# Altium PCB PCB1.pcbdoc (part 2 of 4)
Units mil, origin at the board's own origin, x right, y up, seen from the top; angles counter-clockwise.
Board outline 3346.69 x 4227.01 mil, 4 copper layers (Top Layer, Inner1, Inner2, Bottom Layer); 103 components, 144 nets, 660 pads, 262 vias.
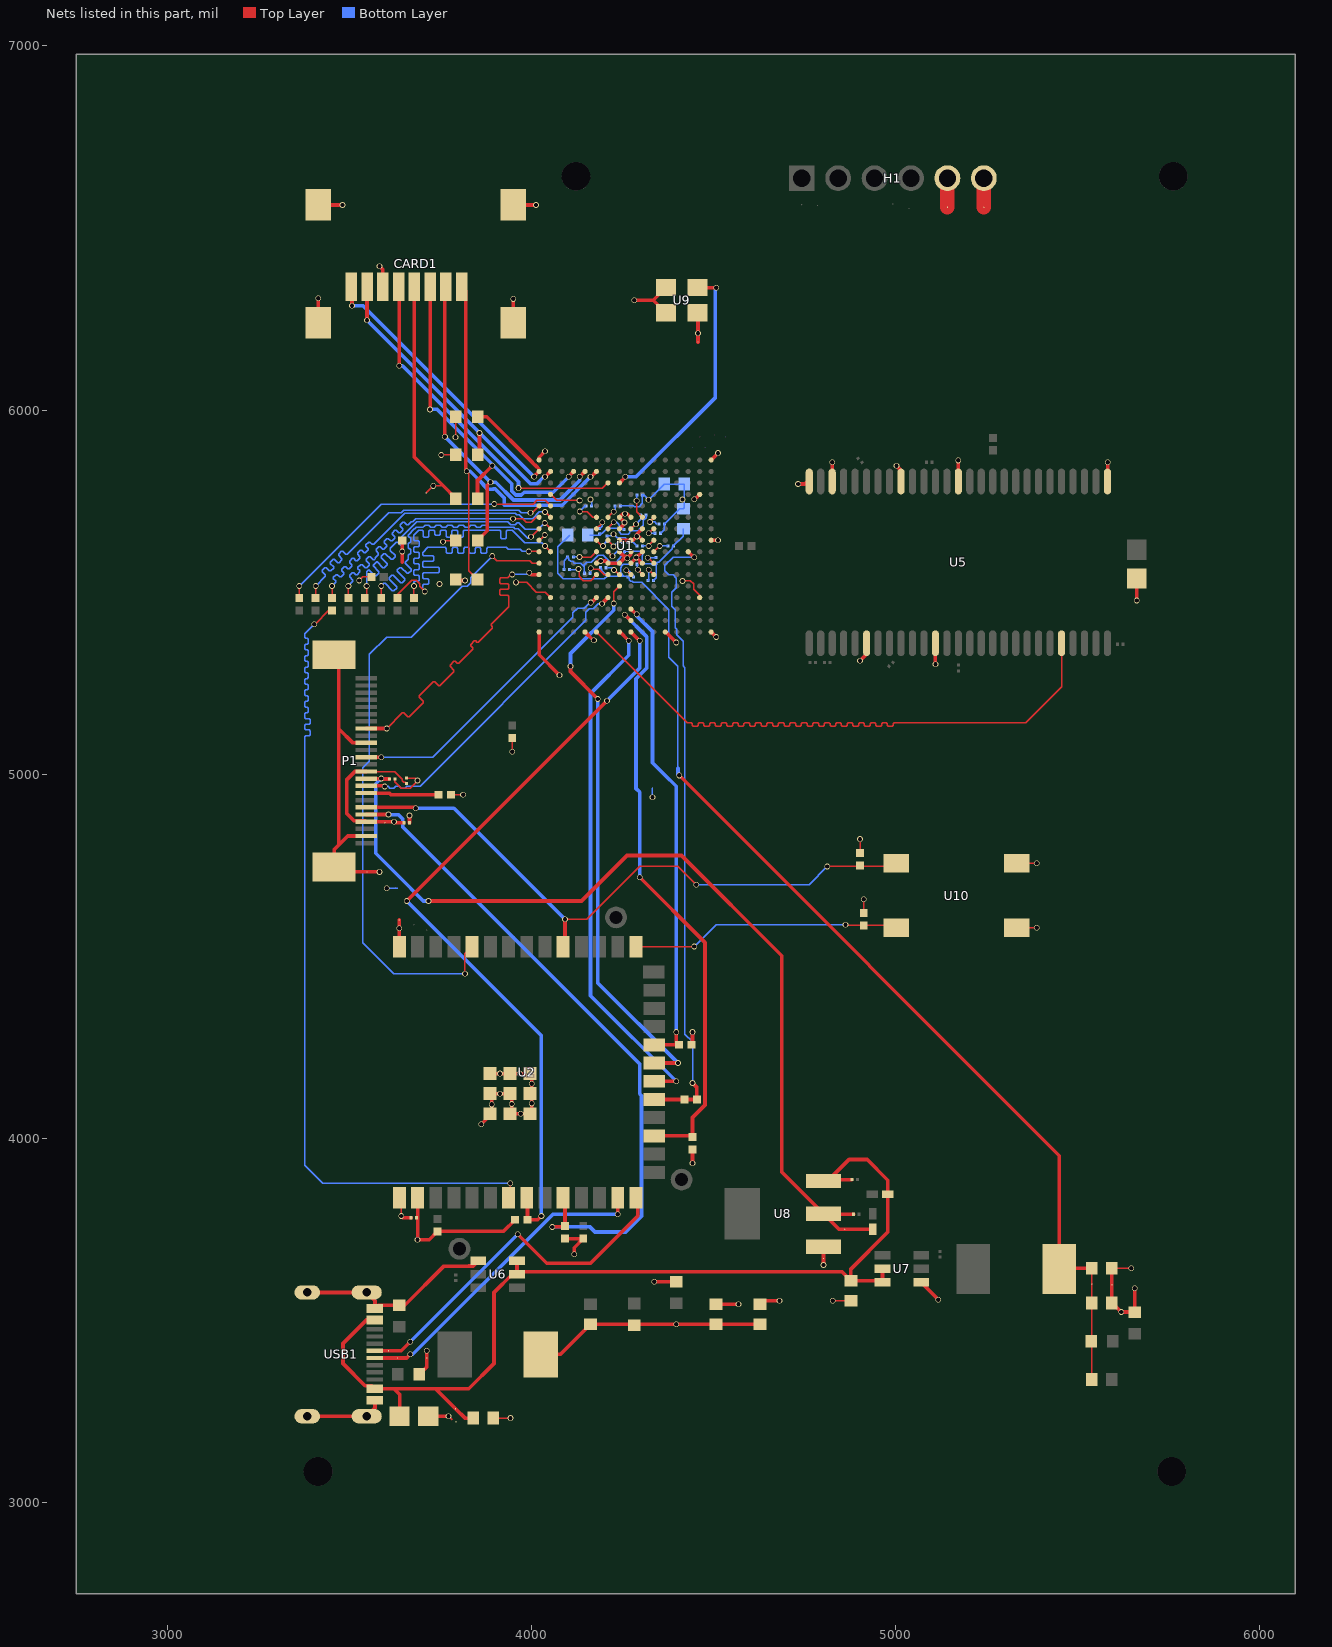
[diagram p4: the nets of this part, all layers, seen from the top]

## Via types
v1: diameter 15.75, hole 11.81, Top Layer to Bottom Layer, 262 vias

## Nets (pads, with @x,y where several pads share a name; then routed paths per layer and width w, separated by ;. In a path a pad name is that pad's centre, name@x,y a point inside that pad or via, vN(x,y) a via of type N, cw(c..) or ccw(c..) an arc to the next point about the centre after c; other vN are vias at no path point) (continued)
$1N30093: R28.2 U2.7 | length 2326.6
  Top Layer w3.94: v1(3403.33,5412.01) 3405.73,5412.01 3443.69,5449.97 R28.2@3452.01,5449.97 ; U2.7@3941.81,3837.52 v1(3941.81,3877.01)
  Bottom Layer w3.94: v1(3403.33,5412.01) 3377.01,5385.69 3377.01,5376.08 3379.79,5373.3 3384.22,5373.3 3387.01,5370.52 3387.01,5360.34 3384.22,5357.55 3379.79,5357.55 3377.01,5354.77 3377.01,5344.59 3379.79,5341.8 3384.22,5341.8 3387.01,5339.02 3387.01,5328.84 3384.22,5326.06 3379.79,5326.06 3377.01,5323.27 3377.01,5313.09 3379.79,5310.31 3384.22,5310.31 3387.01,5307.52 3387.01,5297.34 3384.22,5294.56 3379.79,5294.56 3377.01,5291.78 3377.01,5281.6 3379.79,5278.81 3384.22,5278.81 3387.01,5276.03 3387.01,5265.85 3384.22,5263.06 3379.79,5263.06 3377.01,5260.28 3377.01,5250.1 3379.79,5247.32 3384.22,5247.32 3387.01,5244.53 3387.01,5234.35 3384.22,5231.57 3379.79,5231.57 3377.01,5228.78 3377.01,5218.6 3379.79,5215.82 3384.22,5215.82 3387.01,5213.04 3387.01,5202.86 3384.22,5200.07 3379.79,5200.07 3377.01,5197.29 3377.01,5187.11 3379.79,5184.32 3384.22,5184.32 3387.01,5181.54 3387.01,5171.36 3384.22,5168.58 3379.79,5168.58 3377.01,5165.79 3377.01,5155.94 3379.79,5153.15 3389.22,5153.15 3392.01,5150.37 3392.01,5140.19 3389.22,5137.4 3379.79,5137.4 3377.01,5134.62 3377.01,5124.44 3379.79,5121.66 3389.22,5121.66 3392.01,5118.87 3392.01,5108.69 3389.22,5105.91 3379.79,5105.91 3377.01,5103.12 3377.01,3927.01 3427.01,3877.01 v1(3941.81,3877.01)
$1N33205: P1.8 R35.1 | length 199.9
  Top Layer w10: P1.8@3546.45,4948.6 3547.28,4947.77 3609.82,4947.77 3613.64,4943.95 R35.1@3744.42,4943.95
$1N36431: C37.2 U1.F6 | length 75.3
  Top Layer w3.94: v1(4132.61,5721.78) 4133.61,5720.79 4153,5720.79 4168.04,5705.75 U1.F6@4178.27,5705.75
  Bottom Layer w3.94: v1(4132.61,5721.78) 4147.83,5737.01 C37.2@4149.33,5737.01
$1N36495: C38.2 U1.F7 | length 39
  Top Layer w3.94: U1.F7@4209.77,5705.75 v1@4224.77,5720.75
  Bottom Layer w3.94: v1(4225.75,5720.75) 4229.33,5724.33 C38.2@4229.33,5737.01
$1N36552: C39.2 U1.F10 | length 68.1
  Top Layer w3.94: v1(4288.5,5751.12) 4288.5,5721.49 U1.F10@4304.25,5705.75
  Bottom Layer w3.94: v1(4288.5,5751.12) 4289.33,5751.95 C39.2@4289.33,5767.01
$1N36571: C40.2 U1.F11 | length 39
  Top Layer w3.94: v1(4324.96,5693.08) 4335.75,5703.87 U1.F11@4335.75,5705.75
  Bottom Layer w3.94: v1(4324.96,5693.08) 4338.26,5693.08 4344.33,5687.01
$1N36646: C41.2 U1.G6 | length 44.2
  Top Layer w3.94: U1.G6@4178.27,5674.25 4194.02,5690 v1(4194.02,5691.88)
  Bottom Layer w3.94: C41.2@4187.01,5674.69 4194.02,5681.7 v1(4194.02,5691.88)
$1N36690: C42.2 U1.G7 | length 62.6
  Top Layer w3.94: U1.G7@4209.77,5674.25 4209.77,5676.13 v1(4225.51,5691.87)
  Bottom Layer w3.94: v1(4225.51,5691.87) 4234.46,5691.87 4239.3,5687.04 4239.3,5684.68 4248.57,5675.41 4250.93,5675.41 C42.2@4254.33,5672.01
$1N36752: C43.2 U1.G9 | length 49.6
  Top Layer w3.94: U1.G9@4272.76,5674.25 4285.52,5687.01 v1(4287.01,5687.01)
  Bottom Layer w3.94: v1(4287.01,5687.01) 4298.8,5698.8 4298.8,5700.44 4299.33,5700.97 C43.2@4299.33,5712.01
$1N36807: C44.2 U1.G11 | length 37.1
  Top Layer w3.94: v1(4321.54,5661.92) 4333.87,5674.25 U1.G11@4335.75,5674.25
  Bottom Layer w3.94: v1(4321.54,5661.92) 4339.24,5661.92 C44.2@4339.33,5662.01
$1N36895: C45.2 U1.H6 | length 38.4
  Top Layer w3.94: U1.H6@4178.27,5642.76 4192.01,5629.02 v1@4192.01,5627.01
  Bottom Layer w3.94: v1(4195.93,5626.98) 4195.93,5628.25 C45.2@4207.01,5639.33
$1N36953: C46.2 U1.H7 | length 52.4
  Top Layer w3.94: U1.H7@4209.77,5642.76 4224.95,5627.57 v1(4224.95,5625.69)
  Bottom Layer w3.94: v1(4224.95,5625.69) 4236.26,5637.01 C46.2@4249.33,5637.01
$1N37097: C47.2 U1.H11 | length 38.6
  Top Layer w3.94: v1@4322.01,5627.01 4322.01,5629.02 U1.H11@4335.75,5642.76
  Bottom Layer w3.94: C47.2@4304.69,5627.01 v1@4321.88,5627.01
  other v1: 4321.94,5627.07
$1N37150: C48.1 U1.L11 | length 50.4
  Top Layer w3.94: v1(4322.01,5562.01) U1.L11@4335.75,5548.27
  Bottom Layer w3.94: C48.1@4319.69,5532.01 4322.01,5534.33 v1(4322.01,5562.01)
$1N37245: C50.1 U1.L7 | length 69.2
  Top Layer w3.94: v1(4162.52,5565.9) 4165.11,5563.31 4184.5,5563.31 4199.54,5548.27 U1.L7@4209.77,5548.27
  Bottom Layer w3.94: C50.1@4160.69,5552.01 4162.52,5553.84 v1(4162.52,5565.9)
$1N37295: C51.1 U1.L6 | length 105.8
  Top Layer w3.94: v1(4129.15,5564.02) 4130.32,5562.85 4130.32,5543.45 4141.76,5532.01 4162.01,5532.01 U1.L6@4178.27,5548.27
  Bottom Layer w3.94: C51.1@4104.69,5562.01 4127.14,5562.01 v1(4129.15,5564.02)
$1N37345: C52.1 U1.K11 | length 46.7
  Top Layer w3.94: v1@4317.01,5592.01 4323.51,5592.01 U1.K11@4335.75,5579.77
  Bottom Layer w3.94: v1(4319.32,5594.32) 4341.64,5594.32 C52.1@4342.01,5594.69
$1N37361: C49.1 U1.L10 | length 34.8
  Top Layer w3.94: v1(4292.01,5562.01) 4304.25,5549.77 U1.L10@4304.25,5548.27
  Bottom Layer w3.94: C49.1@4289.69,5577.01 4289.69,5564.33 v1(4292.01,5562.01)
$1N37409: C53.1 U1.L9 | length 46.9
  Top Layer w3.94: v1(4260.28,5560.2) 4260.83,5560.2 U1.L9@4272.76,5548.27
  Bottom Layer w3.94: v1(4260.28,5560.2) 4265.85,5560.2 4279.69,5546.36 C53.1@4279.69,5542.01
$1N37470: C54.1 U1.L8 | length 39.3
  Top Layer w3.94: v1(4226.66,5560.91) 4228.62,5560.91 U1.L8@4241.26,5548.27
  Bottom Layer w3.94: 4209.69,5567.01 4220.57,5567.01 v1(4226.66,5560.91)
$1N37518: C55.1 U1.J11 | length 45.1
  Top Layer w3.94: U1.J11@4335.75,5611.26 4351.5,5627.01 v1(4352.01,5627.01)
  Bottom Layer w3.94: v1(4352.01,5627.01) C55.1@4374.33,5627.01
$1N37600: C56.1 U1.J6 | length 70
  Top Layer w3.94: v1@4132.01,5597.01 4139.75,5597.01 4140.54,5596.22 4163.23,5596.22 U1.J6@4178.27,5611.26
  Bottom Layer w3.94: C56.1@4114.69,5597.01 4131.4,5597.01 v1(4131.7,5596.7)
$1N37637: C57.1 U1.J7 | length 44.9
  Top Layer w3.94: U1.J7@4209.77,5611.26 4222.01,5599.02 v1@4222.01,5597.01
  Bottom Layer w3.94: v1(4222.01,5598.63) 4239.33,5615.95 4239.33,5617.01
$1N41066: C48.2 C50.2 C51.2 C52.2 C55.2 C56.2 C57.2 C59.1 | length 581.3
  Bottom Layer w3.94: C51.2@4089.33,5562.01 4089.33,5587.01 C56.2@4099.33,5597.01 4100.33,5597.01 4102.6,5594.73 4102.6,5589.38 4107.26,5584.72 4112.61,5584.72 4117.49,5579.84 4135.7,5579.84 4144.98,5570.57 4144.98,5552.36 C50.2@4145.33,5552.01 4145.33,5575.33 4152.01,5582.01 4163.8,5582.01 4183.46,5601.68 4196.58,5601.68 4215.45,5582.8 4232.03,5582.8 4254.69,5608.35 C57.2@4254.69,5612.01 4297.01,5612.01 4304.79,5604.22 4304.79,5602.17 4303.49,5600.87 4303.49,5582.76 4308.42,5577.83 4328.56,5577.83 4332.91,5573.49 4341.17,5573.49 4342.01,5574.33 ; C48.2@4334.69,5532.01 4342.01,5539.33 4342.01,5574.33 ; C59.1@4417.01,5674.45 4417.01,5654.33 C55.2@4389.69,5627.01 4386.41,5623.73 4386.41,5619.38 4349.63,5582.6 4345.28,5582.6 C52.2@4342.01,5579.33 4342.01,5574.33
$1N47813: C41.1 C42.1 C43.1 C61.1 | length 220.6
  Bottom Layer w3.94: C61.1@4159.57,5657.01 4186.81,5657.01 4192.4,5662.6 ; C41.1@4187.01,5659.33 4187.01,5662.01 4187.6,5662.6 4192.4,5662.6 ; C43.1@4314.69,5712.01 4314.69,5705.19 4306.67,5697.17 4306.67,5684.29 4295.8,5673.42 4295.8,5669.15 4269.69,5669.15 4269.69,5663.66 4265.75,5659.72 4246.9,5659.72 4240.74,5665.88 4240.74,5672.1 4236.8,5676.05 4208.08,5676.05 4194.63,5662.6 4192.4,5662.6
+1V1: C25.2 C27.2 C28.2 C49.2 C53.2 C54.2 C61.2 L2.2 pad.55@4402.01,5016.04 pad.55@5538.63,3599.7 R15.2 | length 3215
  Top Layer w3.94: C25.2@5538.63,3338.55 C28.2@5538.63,3548.55 pad.55@5538.63,3599.7 C27.2@5538.63,3643.55
  Top Layer w10: v1(4405.28,4997.01) 5449.48,3952.8 L2.2@5449.48,3641.78 5451.24,3643.55 C27.2@5538.63,3643.55
  Bottom Layer w3.94: C61.2@4104.45,5657.01 4072.01,5624.57 4072.01,5552.01 4087.01,5537.01 4200.25,5537.01 4207.61,5544.37 ; C54.2@4189.33,5567.01 4192.6,5563.73 4192.6,5559.38 4207.61,5544.37 ; C49.2@4274.33,5577.01 4252.01,5577.01 4245.7,5570.7 4245.7,5568.01 4244.45,5566.75 4244.45,5553.64 4253.72,5544.37 ; pad.55@4402.01,5016.04 4402.01,5297.01 4377.01,5322.01 4377.01,5452.01 4302.01,5527.01 4279.33,5527.01 4276.61,5529.72 4272.26,5529.72 4267.6,5534.38 4267.6,5538.73 C53.2@4264.33,5542.01 4261.97,5544.37 4253.72,5544.37 ; 4207.61,5544.37 4253.72,5544.37
  Bottom Layer w10: pad.55@4402.01,5016.04 4402.01,5000.28 v1(4405.28,4997.01)
+1V8: C29.1 C32.2 C36.1 P1.10 pad.55@3633.63,4721.24 pad.55@4860.06,3750.55 U8.2 | length 2600
  Top Layer w10: P1.10@3546.45,4987.97 3586.3,4987.97 v1(3587.04,4988.71) 3588.74,4987.01 C36.1@3609.33,4987.01 ; v1(3717.01,4652.01) 4137.01,4652.01 4262.01,4777.01 4412.01,4777.01 4687.01,4502.01 4687.01,3907.9 U8.2@4801.76,3793.15 ; C29.1@4884.33,3792.01 4802.9,3792.01 4844.36,3750.55 pad.55@4860.06,3750.55 C32.2@4937.01,3750.55
  Bottom Layer w10: v1(3587.04,4988.71) 3572.01,4973.68 3572.01,4782.87 pad.55@3633.63,4721.24 3702.87,4652.01 v1(3717.01,4652.01)
+3V3: C8.2 C17.2 C19.2 C22.2 C23.2 C34.1 C35.1 C37.1 C38.1 C39.1 C40.1 C44.1 C45.1 C46.1 C47.1 C58.1 C58.2 C59.2 CARD1.4 H1.5 L1.2 P1.4 P1.11 pad.55@3597.01,4867.01 pad.55@3710.8,5772.84 pad.55@5142.01,6557.01 R3.1 R4.1 R5.2 R7.2 R11.2 R16.2 R17.2 R18.2 R19.2 R20.2 R21.2 R22.2 R23.1 U2.2 U9.1 U9.4 | length 3357.4
  Top Layer w3.94: v1(3527.08,5532.43) 3536.66,5542.01 R23.1@3559.97,5542.01 ; P1.11@3546.45,5007.65 3623.75,5007.65 3644.72,4986.68 3644.72,4982.26 3649.38,4977.6 3653.73,4977.6 C35.1@3657.01,4974.33 ; pad.55@3710.8,5772.84 v1(3729.97,5792.01) 3757.19,5792.01 3757.27,5792.09 ; v1(3752.01,5877.01) R18.2@3792.35,5877.01 ; v1(3757.01,5638.66) 3760.35,5642.01 R17.2@3792.35,5642.01 ; v1@3792.35,5927.01 R19.2@3792.35,5982.01
  Top Layer w10: P1.11@3546.45,5007.65 3515.16,5007.65 3492.01,4984.5 3492.01,4893.02 3512.37,4872.65 3543.66,4872.65 P1.4@3546.45,4869.86 3596.71,4869.86 v1(3622.01,4869.86) 3624.86,4867.01 C34.1@3649.33,4867.01 ; CARD1.4@3678.07,6339.02 3678.07,5871.28 3757.27,5792.09 R20.2@3792.35,5757.01 ; U2.2@3691.81,3837.52 3687.01,3832.71 v1(3687.01,3722.01) 3719.05,3722.01 R7.2@3742.01,3744.97 3922.93,3744.97 R5.2@3954.97,3777.01 ; R16.2@3792.19,5534.98 3795.17,5532.01 v1(3817.01,5532.01) ; L1.2@4025.12,3407.01 4079.57,3407.01 C19.2@4162.01,3489.45 4279.91,3489.45 R11.2@4282.01,3487.35 4284.11,3489.45 v1(4397.58,3489.45) C23.2@4507.01,3489.45 C22.2@4627.01,3489.45 ; R21.2@4092.01,3724.97 R22.2@4142.01,3724.97 4117.01,3699.97 v1(4117.01,3682.01) ; v1(4282.01,6302.01) 4334.25,6302.01 ; U9.1@4368.7,6267.56 4334.25,6302.01 ; U9.4@4368.7,6336.46 4334.25,6302.01 ; R3.1@4439.05,4257.01 4442.01,4259.97 v1(4442.01,4292.01) ; v1(4442.01,3932.01) R4.1@4442.01,3969.97 ; v1(5662.01,5477.01) C8.2@5662.01,5537.64
  Top Layer w39.37: pad.55@5142.01,6557.01 H1.5@5142.01,6637.01
  Bottom Layer w3.94: v1@4162.01,5757.01 4164.69,5754.33 C37.1@4164.69,5737.01 ; C45.1@4207.01,5654.69 4220.2,5654.69 v1(4224.92,5659.4) 4235.03,5649.29 4256.76,5649.29 4261.41,5644.63 4261.41,5640.28 C46.1@4264.69,5637.01 4279.33,5637.01 C47.1@4289.33,5627.01 ; C38.1@4244.69,5737.01 4280.24,5737.01 4281.95,5735.3 4295.06,5735.3 4304.33,5744.57 4304.33,5766.65 C39.1@4304.69,5767.01 4307.86,5767.01 v1(4321.27,5753.59) 4364.45,5796.77 C58.2@4364.45,5797.01 C58.1@4419.57,5797.01 4419.57,5732.13 C59.2@4417.01,5729.57 4407.25,5729.57 C40.1@4364.69,5687.01 4364.69,5672.01 C44.1@4354.69,5662.01
  other v1: 3747.01,5522.56 4162.01,5754.36 4414.72,5754.67 3791.03,5925.69
+5V: C20.2 C26.2 C30.1 C31.2 C33.2 pad.55@3791.26,3257.75 U6.2 U6.3 U7.2 U7.3 U8.3 USB1.A4B9 USB1.B4A9 | length 2837
  Top Layer w10: USB1.A4B9@3570.02,3501.5 3546.5,3501.5 3482.01,3437.01 3482.01,3382.04 3542.83,3321.22 3561.32,3321.22 USB1.B4A9@3570.02,3312.52 3622.37,3312.52 ; C33.2@3637.64,3237.01 3637.64,3297.25 3622.37,3312.52 ; C20.2@3839.45,3232.01 3817.01,3232.01 pad.55@3791.26,3257.75 3736.5,3312.52 ; U6.3@3960.16,3664.41 U6.2@3960.16,3627.01 ; U8.3@4801.76,3883.7 4813.7,3883.7 U8.3@4817.01,3887.01 ; C30.1@4879.33,3887.01 U8.3@4817.01,3887.01 ; U7.2@4963.86,3642.01 U7.3@4963.86,3604.61 4958.9,3609.57 C26.2@4877.01,3609.57 ; 3622.37,3312.52 3736.5,3312.52 ; 3736.5,3312.52 3827.52,3312.52 3897.01,3382.01 3897.01,3577.01 3947.01,3627.01 U6.2@3960.16,3627.01 ; U6.2@3960.16,3627.01 3966.68,3633.53 4853.05,3633.53 C26.2@4877.01,3609.57 ; U8.3@4817.01,3887.01 4872.01,3942.01 4922.01,3942.01 4978.47,3885.55 C31.2@4978.47,3847.01 4978.47,3743.02 4877.01,3641.56 C26.2@4877.01,3609.57
CCLK: R6.1 R6.2 U1.J14 U2.19 | length 1745.1
  Top Layer w10: U2.19@4342.2,4107.01 R6.1@4419.97,4107.01 R6.2@4454.05,4107.01 4454.05,4139.97 v1(4442.01,4152.01) ; U1.J14@4430.24,5611.26 4445.31,5596.18 v1(4447.01,5596.18)
  Bottom Layer w3.94: v1(4442.01,4152.01) 4442.01,4265.34 4421.1,4286.24 4421.1,5292.91 4416.18,5297.83 4416.18,5365.22 4398.18,5383.22 4398.18,5398.58 4394.27,5402.49 4394.27,5451.94 4385.28,5460.94 4385.28,5500.28 4397.83,5512.83 4397.83,5538.56 4388.56,5547.83 4377.32,5547.83 4366.12,5559.04 4366.12,5573.5 4388.8,5596.18 v1(4447.01,5596.18)
CRYSTAL: U1.C8 U9.3 | length 715.6
  Top Layer w10: U1.C8@4241.26,5800.24 4257.01,5815.99 v1(4257.01,5817.01) ; U9.3@4455.32,6336.46 v1(4507.01,6336.46)
  Bottom Layer w10: v1(4257.01,5817.01) 4287.01,5817.01 4504.92,6034.92 4504.92,6334.37 v1(4507.01,6336.46)
D0: R26.1 U1.E2 | length 827.3
  Top Layer w3.94: R26.1@3362.01,5484.05 v1(3362.01,5517.01) ; v1@3897.01,5742.01 4004.28,5742.01 4014.56,5752.29 4037.25,5752.29 U1.E2@4052.29,5737.25
  Bottom Layer w3.94: v1(3362.01,5517.01) 3587.01,5742.01 v1(3897.39,5742.01)
D1: R27.1 U1.E1 | length 830.3
  Top Layer w3.94: R27.1@3407.01,5484.05 v1(3407.01,5517.01) ; v1(3997.01,5718.15) 4001.69,5718.15 U1.E1@4020.79,5737.25
  Bottom Layer w3.94: v1(3407.01,5517.01) 3433.98,5543.98 3433.98,5547.91 3425.41,5556.48 3425.41,5560.41 3432.61,5567.61 3436.55,5567.61 3445.11,5559.05 3449.05,5559.05 3456.25,5566.25 3456.25,5570.19 3447.69,5578.75 3447.69,5582.69 3454.88,5589.88 3458.82,5589.88 3467.38,5581.32 3471.32,5581.32 3478.52,5588.52 3478.52,5592.46 3469.96,5601.02 3469.96,5604.96 3477.15,5612.15 3481.09,5612.15 3489.65,5603.59 3493.59,5603.59 3608.15,5718.15 3642.01,5718.15 3649.02,5725.16 3965.23,5725.16 3972.24,5718.15 v1(3997.01,5718.15)
D2: R28.1 U1.F2 | length 844.7
  Top Layer w3.94: R28.1@3452.01,5484.05 v1(3452.01,5517.01) ; v1(4036.89,5720.31) 4037.73,5720.31 U1.F2@4052.29,5705.75
  Bottom Layer w3.94: v1(3452.01,5517.01) 3462.01,5527.01 3462.01,5530.94 3455.94,5537.01 3455.94,5540.94 3463.14,5548.14 3467.08,5548.14 3473.14,5542.08 3477.08,5542.08 3484.28,5549.28 3484.28,5553.22 3478.22,5559.28 3478.22,5563.22 3485.41,5570.41 3489.35,5570.41 3495.41,5564.35 3499.35,5564.35 3506.55,5571.55 3506.55,5575.49 3500.49,5581.55 3500.49,5585.49 3507.69,5592.69 3511.62,5592.69 3517.69,5586.62 3521.62,5586.62 3528.82,5593.82 3528.82,5597.76 3522.76,5603.82 3522.76,5607.76 3529.96,5614.96 3533.89,5614.96 3539.96,5608.89 3543.89,5608.89 3551.09,5616.09 3551.09,5620.03 3545.03,5626.09 3545.03,5630.03 3552.23,5637.23 3556.16,5637.23 3562.23,5631.16 3566.16,5631.16 3652.28,5717.28 3955.33,5717.28 3959.64,5712.97 3966.28,5712.97 3976.93,5702.32 4003.56,5702.32 4021.55,5720.31 v1(4036.89,5720.31)
D3: R29.1 U1.F1 | length 814.7
  Top Layer w3.94: R29.1@3497.01,5484.05 v1(3497.01,5517.01) ; v1(3948.78,5701.46) 3976.32,5701.46 3985.45,5692.32 3998.56,5692.32 4012.66,5706.42 4020.12,5706.42 U1.F1@4020.79,5705.75
  Bottom Layer w3.94: v1(3497.01,5517.01) 3509.58,5529.58 3509.58,5533.52 3501.02,5542.08 3501.02,5546.02 3508.21,5553.21 3512.15,5553.21 3516.85,5548.52 3520.79,5548.52 3527.98,5555.72 3527.98,5559.65 3523.29,5564.35 3523.29,5568.29 3530.49,5575.49 3534.42,5575.49 3542.99,5566.92 3546.92,5566.92 3554.12,5574.12 3554.12,5578.06 3545.56,5586.62 3545.56,5590.56 3552.76,5597.76 3556.69,5597.76 3565.26,5589.19 3569.19,5589.19 3571.26,5591.26 3571.26,5595.05 3579.61,5603.41 3579.61,5607.34 3572.95,5614.01 3572.95,5617.95 3580.14,5625.14 3584.08,5625.14 3590.75,5618.48 3594.68,5618.48 3601.88,5625.68 3601.88,5629.61 3595.22,5636.28 3595.22,5640.22 3602.42,5647.42 3606.35,5647.42 3613.02,5640.75 3616.96,5640.75 3624.15,5647.95 3624.15,5651.88 3617.49,5658.55 3617.49,5662.49 3624.69,5669.69 3628.62,5669.69 3635.29,5663.02 3639.23,5663.02 3646.42,5670.22 3646.42,5674.16 3639.76,5680.82 3639.76,5684.76 3646.96,5691.96 3650.89,5691.96 3657.56,5685.29 3661.5,5685.29 3669.71,5693.5 3673.5,5693.5 3681.46,5701.46 v1(3948.78,5701.46)
D4: R30.1 U1.G2 | length 836.9
  Top Layer w3.94: R30.1@3542.01,5484.05 3547.01,5489.05 v1(3547.01,5517.01) ; v1(4036.29,5690.13) 4036.41,5690.13 U1.G2@4052.29,5674.25
  Bottom Layer w3.94: v1(3547.01,5517.01) 3547.01,5555.87 3552.76,5561.63 3553.47,5561.63 3569.69,5545.41 3573.63,5545.41 3580.83,5552.61 3580.83,5556.55 3564.61,5572.76 3564.61,5573.48 3575.04,5583.9 3575.75,5583.9 3591.96,5567.68 3595.9,5567.68 3603.1,5574.88 3603.1,5578.82 3586.88,5595.04 3586.88,5598.97 3594.08,5606.17 3598.02,5606.17 3614.23,5589.95 3618.17,5589.95 3625.37,5597.15 3625.37,5601.09 3612.01,5614.45 3612.01,5620.87 3628.77,5637.63 3632.7,5637.63 3641.3,5629.04 3645.23,5629.04 3652.43,5636.24 3652.43,5640.17 3643.84,5648.77 3643.84,5652.7 3684.72,5693.58 3934.27,5693.58 3942.22,5685.63 3955.33,5685.63 3960.33,5690.63 3964.6,5690.63 3982.39,5672.83 4019,5672.83 v1(4036.29,5690.13)
D5: R31.1 U1.G1 | length 826
  Top Layer w3.94: R31.1@3587.01,5484.05 v1(3587.01,5517.01) ; v1(3998.33,5652.01) 3998.55,5652.01 U1.G1@4020.79,5674.25
  Bottom Layer w3.94: v1(3587.01,5517.01) 3594.05,5524.05 3597.98,5524.05 3618.03,5504 3621.96,5504 3629.16,5511.2 3629.16,5515.14 3609.12,5535.18 3609.12,5539.12 3616.32,5546.32 3620.25,5546.32 3640.3,5526.28 3644.23,5526.28 3651.43,5533.47 3651.43,5537.41 3631.39,5557.45 3631.39,5561.39 3637.83,5567.83 3641.77,5567.83 3658,5551.6 3661.94,5551.6 3669.13,5558.8 3669.13,5562.74 3652.9,5578.97 3652.9,5582.9 3660.79,5590.79 3660.79,5600.93 3663.58,5603.72 3665.2,5603.72 3667.98,5606.5 3667.98,5616.68 3665.2,5619.47 3663.58,5619.47 3660.79,5622.25 3660.79,5632.43 3663.58,5635.21 3665.2,5635.21 3667.98,5638 3667.98,5648.18 3665.2,5650.96 3663.58,5650.96 3660.79,5653.75 3660.79,5656.64 3678.36,5674.21 3679.21,5674.21 3682.76,5677.76 3701.87,5677.76 3704.65,5680.54 3704.65,5681.77 3707.43,5684.56 3717.61,5684.56 3720.4,5681.77 3720.4,5680.54 3723.18,5677.76 3733.36,5677.76 3736.15,5680.54 3736.15,5681.77 3738.93,5684.56 3749.11,5684.56 3751.89,5681.77 3751.89,5680.54 3754.68,5677.76 3764.86,5677.76 3767.64,5680.54 3767.64,5681.77 3770.43,5684.56 3780.61,5684.56 3783.39,5681.77 3783.39,5680.54 3786.17,5677.76 3796.36,5677.76 3799.14,5680.54 3799.14,5681.77 3801.92,5684.56 3812.1,5684.56 3814.89,5681.77 3814.89,5680.54 3817.67,5677.76 3827.85,5677.76 3830.63,5680.54 3830.63,5681.77 3833.42,5684.56 3843.6,5684.56 3846.38,5681.77 3846.38,5680.54 3849.17,5677.76 3859.35,5677.76 3862.13,5680.54 3862.13,5681.77 3864.91,5684.56 3875.1,5684.56 3877.88,5681.77 3877.88,5680.54 3880.66,5677.76 3950.92,5677.76 3954.47,5674.21 3963.47,5674.21 3989.22,5648.46 3994.78,5648.46 v1(3998.33,5652.01)
D6: R32.1 U1.J1 | length 823.8
  Top Layer w3.94: R32.1@3632.01,5484.05 3632.01,5494.39 3670.45,5532.83 3683.56,5532.83 3692.83,5523.56 3692.83,5516.18 v1(3707.01,5502.01) ; v1(3992.01,5612.01) 4020.04,5612.01 U1.J1@4020.79,5611.26
  Bottom Layer w3.94: v1(3707.01,5502.01) 3701.18,5507.83 3701.18,5519.02 3703.97,5521.8 3714.37,5521.8 3717.15,5524.58 3717.15,5534.76 3714.37,5537.55 3703.97,5537.55 3701.18,5540.33 3701.18,5550.51 3703.97,5553.3 3744.22,5553.3 3747.01,5556.08 3747.01,5566.26 3744.22,5569.04 3703.97,5569.04 3701.18,5571.83 3701.18,5582.01 3703.97,5584.79 3729.21,5584.79 3732,5587.58 3732,5597.76 3729.21,5600.54 3703.97,5600.54 3701.18,5603.32 3701.18,5608.56 3715.45,5622.83 3763.38,5622.83 3766.17,5620.05 3766.17,5609.79 3768.95,5607.01 3779.13,5607.01 3781.92,5609.79 3781.92,5620.05 3784.7,5622.83 3794.88,5622.83 3797.66,5620.05 3797.66,5609.79 3800.45,5607.01 3810.63,5607.01 3813.41,5609.79 3813.41,5620.05 3816.2,5622.83 3826.38,5622.83 3829.16,5620.05 3829.16,5609.79 3831.94,5607.01 3842.12,5607.01 3844.91,5609.79 3844.91,5620.05 3847.69,5622.83 3857.87,5622.83 3860.66,5620.05 3860.66,5609.79 3863.44,5607.01 3873.62,5607.01 3876.4,5609.79 3876.4,5620.05 3879.19,5622.83 3931.18,5622.83 3936.18,5617.83 3968.56,5617.83 3974.39,5612.01 v1(3992.01,5612.01)
D7: R34.1 U1.J2 | length 826.3
  Top Layer w3.94: R34.1@3677.01,5484.05 v1(3677.01,5517.01) ; v1(4037.01,5627.01) 4037.01,5626.54 U1.J2@4052.29,5611.26
  Bottom Layer w3.94: v1(3677.01,5517.01) 3677.01,5527.8 3679.79,5530.59 3689.37,5530.59 3692.15,5533.37 3692.15,5543.55 3689.37,5546.34 3679.79,5546.34 3677.01,5549.12 3677.01,5559.3 3679.79,5562.08 3689.37,5562.08 3692.15,5564.87 3692.15,5575.05 3689.37,5577.83 3679.79,5577.83 3677.01,5580.62 3677.01,5590.8 3679.79,5593.58 3689.37,5593.58 3692.15,5596.36 3692.15,5606.54 3689.37,5609.33 3679.79,5609.33 3677.01,5612.11 3677.01,5622.29 3679.79,5625.08 3689.37,5625.08 3692.15,5627.86 3692.15,5638.04 3689.37,5640.82 3679.79,5640.82 3677.01,5643.61 3677.01,5657.01 3689.88,5669.88 3699.67,5669.88 3702.45,5667.1 3702.45,5653.78 3705.24,5651 3715.42,5651 3718.2,5653.78 3718.2,5667.1 3720.99,5669.88 3731.17,5669.88 3733.95,5667.1 3733.95,5659.35 3736.73,5656.56 3746.91,5656.56 3749.7,5659.35 3749.7,5667.1 3752.48,5669.88 3762.66,5669.88 3765.45,5667.1 3765.45,5653.78 3768.23,5651 3778.41,5651 3781.19,5653.78 3781.19,5667.1 3783.98,5669.88 3794.16,5669.88 3796.94,5667.1 3796.94,5653.78 3799.73,5651 3809.91,5651 3812.69,5653.78 3812.69,5667.1 3815.47,5669.88 3912.07,5669.88 3914.85,5667.1 3914.85,5649.79 3917.64,5647.01 3927.82,5647.01 3930.6,5649.79 3930.6,5667.1 3933.39,5669.88 3947.66,5669.88 3981.36,5636.18 4027.83,5636.18 v1(4037.01,5627.01)
DIN: U1.T8 U2.20 | length 1441.2
  Top Layer w10: U1.T8@4241.26,5390.79 4243.23,5390.79 v1(4267.01,5367.01) ; U2.20@4342.2,4157.01 v1(4397.01,4157.01)
  Bottom Layer w10: v1(4267.01,5367.01) 4267.01,5327.01 4162.01,5222.01 4162.01,4392.01 v1(4397.01,4157.01)
DN: pad.55@3632.01,3397.01 U2.13 USB1.A7 | length 878
  Top Layer w10: USB1.A7@3570.02,3397.17 3621.05,3397.17 3657.17,3397.17 v1(3667.01,3407.01) ; v1(4237.01,3792.01) 4237.01,3832.71 U2.13@4241.81,3837.52
  Bottom Layer w10: v1(3667.01,3407.01) 3673.68,3407.01 4058.68,3792.01 v1(4237.01,3792.01)
DONE: pad.55@4364.77,4999.24 R3.2 U1.P9 U2.22 | length 1315.4
  Top Layer w10: U1.P9@4272.76,5453.78 4287.33,5439.2 v1(4289.2,5439.2) ; U2.22@4342.2,4257.01 R3.2@4404.97,4257.01 4397.01,4264.97 v1(4397.01,4292.01)
  Bottom Layer w10: v1(4289.2,5439.2) 4289.2,5434.81 4332.01,5392.01 4332.01,5032.01 pad.55@4364.77,4999.24 4397.01,4967.01 v1(4397.01,4292.01)
DOUT: U1.M8 U2.21 | length 1547.4
  Top Layer w3.94: v1(4225.51,5468.95) 4225.51,5501.02 U1.M8@4241.26,5516.77
  Top Layer w10: v1(4107.01,5297.01) 4107.01,5282.01 v1(4182.01,5207.01) ; U2.21@4342.2,4207.01 v1(4402.01,4207.01)
  Bottom Layer w10: v1(4107.01,5297.01) 4107.01,5332.01 4225.51,5450.51 v1(4225.51,5468.95) ; v1(4182.01,5207.01) 4182.01,4427.01 v1(4402.01,4207.01)
DP: pad.55@3607.01,3417.01 U2.14 USB1.A6 | length 992
  Top Layer w10: USB1.A6@3570.02,3416.85 3619.28,3416.85 3641.85,3416.85 v1(3667.01,3442.01) ; v1(3962.01,3737.01) 4042.01,3657.01 4162.01,3657.01 4291.81,3786.81 U2.14@4291.81,3837.52
  Bottom Layer w10: v1(3667.01,3442.01) v1(3962.01,3737.01)
GND: C17.1 C20.1 C22.1 C23.1 C26.1 C27.1 C28.1 C33.1 C34.2 C35.2 C36.2 CARD1.6 CARD1.9 CARD1.10 CARD1.11 CARD1.12 H1.6 P1.2 P1.15 P1.25 P1.26 pad.55@3548.45,4732.01 pad.55@3627.01,4687.01 pad.55@3636.81,4599.69 pad.55@3712.01,3397.01 pad.55@3792.01,3222.01 pad.55@4332.01,4962.01 pad.55@4457.01,6187.01 pad.55@4801.76,3670.62 pad.55@5242.01,6557.01 pad.55@5593.75,3598.16 R9.1 R10.1 R12.1 R14.1 R24.1 R25.1 R35.2 R36.2 R37.2 U1.A1 U1.A16 U1.D2 U1.D15 U1.F8 U1.F9 U1.G8 U1.G10 U1.H1 U1.H8 U1.H9 U1.H10 U1.H16 U1.J8 U1.J9 U1.J10 U1.K6 U1.K7 U1.K8 U1.K9 U1.K10 U1.N2 U1.N15 U1.T1 U1.T5 U1.T12 U1.T16 U2.1 U2.40 U2.41 U5.6 U5.12 U5.28 U5.41 U5.46 U5.52 U5.54 U6.4 U7.4 U8.1 U9.2 U10.2 U10.4 USB1.1 USB1.2 USB1.3 USB1.4 USB1.A1B12 USB1.B1A12 | length 5495.7
  Top Layer w3.94: C36.2@3624.69,4987.01 3624.69,4979.33 3641.77,4962.24 3667.24,4962.24 3687.01,4982.01 v1(3687.01,4982.83) 3680.15,4989.69 C35.2@3657.01,4989.69 ; U2.1@3636.81,3837.52 3641.81,3832.52 v1(3641.81,3787.01) ; v1(3772.01,3237.01) 3782.01,3227.01 ; R35.2@3778.5,4943.95 v1(3812.01,4943.95) ; C20.1@3894.57,3232.01 v1(3942.01,3232.01) ; v1(3947.01,5062.01) R25.1@3947.01,5099.97 ; v1(3957.01,5527.01) 3987.01,5527.01 4013.46,5500.56 4037.01,5500.56 U1.N2@4052.29,5485.28 ; 4027.01,5647.01 4036.53,5656.53 v1(4036.53,5657.01) ; U1.D2@4052.29,5768.74 4069.02,5752.01 4077.27,5752.01 4077.55,5752.29 4121.51,5752.29 4121.79,5752.01 v1@4132.01,5752.01 ; v1(4414.49,5530.64) 4419.96,5530.64 4421.13,5531.81 4436.47,5531.81 4445.28,5523 4445.28,5507.66 4461.73,5491.21 U1.N15@4461.73,5485.28 ; v1(4827.01,3554.45) C26.1@4877.01,3554.45 ; R36.2@4902.01,4784.05 v1(4902.01,4822.01) ; R37.2@4912.01,4619.05 v1(4912.01,4657.01) ; U10.4@5332.36,4578.42 v1(5387.01,4578.42) ; U10.2@5332.36,4755.59 v1(5387.01,4755.59) ; C27.1@5593.75,3643.55 v1(5647.01,3643.55)
  Top Layer w10: USB1.4@3384,3236.93 USB1.2@3547.38,3236.93 3570.02,3259.57 USB1.B1A12@3570.02,3281.03 ; USB1.3@3384,3577.09 USB1.1@3547.38,3577.09 3570.02,3554.45 USB1.A1B12@3570.02,3533 3578.69,3541.67 R9.1@3637.01,3541.67 3652.01,3541.67 3759.75,3649.41 3827.26,3649.41 3827.65,3649.8 3839.25,3649.8 U6.4@3853.86,3664.41 ; CARD1.10@3414.29,6240.59 v1(3414.28,6307.18) ; CARD1.9@3414.29,6563.43 v1(3480.63,6563.43) ; P1.25@3457.45,5328.38 3470.61,5315.23 3470.61,5125.37 ; P1.2@3546.45,4830.49 3495.49,4830.49 3470.61,4805.61 ; P1.15@3546.5,5086.24 3509.73,5086.24 3470.61,5125.37 ; v1(3582.5,6395.22) 3591.45,6386.27 CARD1.6@3591.45,6339.02 ; v1(3582.7,4732.01) pad.55@3548.45,4732.01 3471.32,4732.01 P1.26@3457.7,4745.63 3457.7,4792.7 3470.61,4805.61 ; pad.55@3636.81,4599.69 v1(3636.81,4577.16) 3636.81,4531.5 U2.40@3641.81,4526.5 ; v1(3641.81,3787.01) 3646.81,3782.01 C17.1@3669.33,3782.01 ; 3644.97,5582.01 v1(3644.97,5611.75) R24.1@3644.97,5642.01 ; C34.2@3664.69,4867.01 v1(3664.69,4887.01) ; R10.1@3691.67,3352.01 3712.01,3372.35 pad.55@3712.01,3397.01 v1(3712.01,3417.01) ; C33.1@3716.38,3237.01 v1(3772.01,3237.01) ; v1(3862.04,4039.24) 3890.63,4067.83 v1(3890.63,4093.53) 3890.63,4122.95 v1(3913.31,4122.95) 3945.75,4122.95 v1(3945.75,4094.52) 3945.75,4067.83 v1(3970.16,4067.83) 4000.87,4067.83 v1(4000.87,4096.24) v1(4000.87,4149.89) 4000.87,4178.07 v1(3967.45,4178.07) v1(3913.31,4178.07) U2.41@3890.63,4178.07 ; CARD1.11@3949.72,6240.59 v1(3949.72,6305.52) ; CARD1.12@3949.72,6563.43 v1(4012.01,6563.43) ; U1.T1@4020.79,5390.79 4020.79,5328.23 v1(4077.01,5272.01) ; U1.A1@4020.79,5863.23 4020.79,5870.79 v1(4037.01,5887.01) ; U1.T5@4146.77,5390.79 4169.71,5367.84 v1(4171.17,5367.84) ; U1.K6@4178.27,5579.77 4184.35,5585.85 v1(4190.02,5585.85) 4203.69,5585.85 U1.K7@4209.77,5579.77 U1.K8@4241.26,5579.77 v1@4259.45,5597.96 ; U1.J8@4241.26,5611.26 4254.56,5597.96 v1@4259.45,5597.96 ; U1.H8@4241.26,5642.76 U1.H9@4272.76,5642.76 4278.68,5642.76 v1(4289.25,5653.32) ; U1.G8@4241.26,5674.25 4255.12,5688.11 v1(4255.12,5691.24) 4255.12,5691.88 U1.F8@4241.26,5705.75 4251.26,5715.75 v1(4256.64,5715.75) 4262.76,5715.75 U1.F9@4272.76,5705.75 ; U1.K9@4272.76,5579.77 4287.66,5594.67 v1(4287.66,5595.2) ; U1.J9@4272.76,5611.26 4272.76,5603.5 v1(4262.54,5593.29) 4262.54,5594.86 v1@4259.45,5597.96 ; U1.K10@4298.12,5580.87 4298.12,5584.74 v1(4287.66,5595.2) ; U1.J10@4304.25,5611.26 4303.73,5611.26 v1(4287.66,5595.2) ; U1.H10@4304.25,5642.76 4293.68,5653.32 v1(4289.25,5653.32) ; U1.G10@4304.25,5674.25 4289.25,5659.25 v1(4289.25,5653.32) ; v1(4337.01,3606.67) R12.1@4397.01,3606.67 ; U1.T12@4367.25,5390.79 4368.23,5390.79 v1(4397.05,5361.97) ; v1@4447.01,5757.01 4450,5757.01 U1.D15@4461.73,5768.74 ; U9.2@4455.32,6267.56 4457.01,6265.87 v1(4457.01,6210.84) pad.55@4457.01,6187.01 ; U1.T16@4493.23,5390.79 v1(4507.01,5377.01) ; U1.H16@4493.23,5642.76 v1(4512.01,5642.83) ; U1.A16@4493.23,5863.23 v1(4512.01,5882.01) ; C23.1@4507.01,3544.57 v1(4568.19,3544.57) ; C22.1@4627.01,3544.57 4636.89,3554.45 v1(4680.98,3554.45) ; v1(4732.01,5797.01) 4750.43,5797.01 U5.54@4762.56,5809.14 ; v1(4801.76,3652.39) pad.55@4801.76,3670.62 U8.1@4801.76,3702.6 ; U5.52@4825.55,5809.14 v1(4825.55,5857.01) ; v1(4902.01,5312.01) 4920.04,5330.04 U5.6@4920.04,5359.88 ; v1(5002.01,5847.01) 5014.53,5834.49 U5.46@5014.53,5804.14 ; U7.4@5070.16,3604.61 5117.01,3557.76 v1(5117.01,3557.01) ; v1(5109.02,5302.01) U5.12@5109.02,5359.88 ; U5.41@5172.01,5809.14 v1(5172.01,5862.01) ; U5.28@5581.46,5804.14 5582.01,5804.69 v1(5582.01,5857.01) ; C27.1@5593.75,3643.55 pad.55@5593.75,3598.16 C28.1@5593.75,3548.55 v1(5619.09,3523.21) R14.1@5656.19,3523.21 v1(5656.19,3588.55) ; 3470.61,4805.61 3470.61,5125.37
  Top Layer w39.37: pad.55@5242.01,6557.01 H1.6@5242.01,6637.01
  Bottom Layer w3.94: v1(3602.01,4687.01) 3632.01,4687.01 ; v1(4332.01,4937.01) pad.55@4332.01,4962.01
  other v1: 4131.96,5752.06 4447.01,5755.14
HREF: P1.9 U1.N7 | length 902.4
  Top Layer w10: P1.9@3546.45,4968.28 3595.38,4968.28 v1(3597.04,4966.63) ; v1@4192.01,5467.01 4192.01,5467.52 U1.N7@4209.77,5485.28
  Bottom Layer w3.94: v1(3597.04,4966.63) 3606.07,4966.63 3610.69,4962.01 3621.44,4962.01 3626.44,4967.01 3637.19,4967.01 3642.19,4962.01 3652.94,4962.01 3657.94,4967.01 3693.93,4967.01 4149.36,5422.44 4149.36,5445.38 4158.63,5454.65 4169.65,5454.65 4183.33,5468.33 v1(4193.33,5468.33)
INITN: pad.55@3687.91,4621.1 R5.1 U1.T9 U2.8 | length 2136.2
  Top Layer w10: v1(3657.01,4652.01) v1(4207.01,5202.01) ; U2.8@3991.81,3837.52 3989.05,3834.75 R5.1@3989.05,3777.01 4017.01,3777.01 v1(4027.01,3787.01) ; U1.T9@4272.76,5390.79 4296.54,5367.01 v1(4297.01,5367.01)
  Bottom Layer w10: v1(3657.01,4652.01) pad.55@3687.91,4621.1 4027.01,4282.01 v1(4027.01,3787.01) ; v1(4207.01,5202.01) 4297.01,5292.01 v1(4297.01,5367.01)
M_CLK: CARD1.5 U1.C7 | length 946.6
  Top Layer w3.94: v1(3964.16,5785.9) 3964.86,5785.2 4194.73,5785.2 U1.C7@4209.77,5800.24
  Top Layer w10: CARD1.5@3634.76,6339.02 3637.01,6336.77 v1(3637.01,6122.01)
  Bottom Layer w10: v1(3637.01,6122.01) 3645.34,6122.01 3964.16,5803.18 v1(3964.16,5785.9)
M_CMD: CARD1.3 R20.1 U1.B4 | length 974.3
  Top Layer w10: v1(3721.38,6002.01) CARD1.3@3721.38,6339.02 ; R20.1@3851.67,5757.01 3851.67,5806.67 v1(3892.01,5847.01) ; v1(4102.01,5817.01) 4102.01,5818.46 U1.B4@4115.28,5831.73
  Bottom Layer w10: v1(3721.38,6002.01) 3741.38,6002.01 3945.31,5798.09 3945.31,5778.09 3956.35,5767.04 3971.98,5767.04 3979.82,5774.88 4059.88,5774.88 v1(4102.01,5817.01)
M_D0: CARD1.7 R18.1 U1.B2 | length 858.2
  Top Layer w10: v1(3548.15,6247.01) CARD1.7@3548.15,6339.02 ; R18.1@3851.67,5877.01 3857.01,5882.35 v1(3857.01,5937.01) ; v1(4037.01,5817.01) 4037.57,5817.01 U1.B2@4052.29,5831.73
  Bottom Layer w10: v1(3548.15,6247.01) 3997.01,5798.15 4014.82,5798.15 4033.68,5817.01 v1(4037.01,5817.01)
M_D1: CARD1.8 R19.1 U1.B1 | length 1003.9
  Top Layer w10: CARD1.8@3504.84,6339.02 3507.01,6336.85 v1(3507.01,6287.01) ; R19.1@3851.67,5982.01 3876.67,5982.01 4002.72,5855.96 4002.72,5855.74 4013.3,5845.16 4013.52,5845.16 4019.51,5839.17 U1.B1@4019.51,5830.45 ; v1(4007.01,5817.01) 4007.01,5817.95 U1.B1@4019.51,5830.45 ; U1.B1@4020.79,5831.73 U1.B1@4019.51,5830.45
  Bottom Layer w10: v1(3507.01,6287.01) 3537.01,6287.01 v1(4007.01,5817.01)
M_D2: CARD1.1 R16.1 U1.B6 | length 1267.9
  Top Layer w3.94: v1(3822.01,5832.01) 3827.84,5826.18 3827.84,5558.65 R16.1@3851.51,5534.98
  Top Layer w10: CARD1.1@3807.99,6339.02 3819.21,6327.8 3819.21,5834.81 v1(3822.01,5832.01) ; v1(4162.01,5817.01) 4163.55,5817.01 U1.B6@4178.27,5831.73
  Bottom Layer w10: v1(3822.01,5832.01) 3832.01,5832.01 3868.15,5795.87 3868.15,5794.2 3879.2,5783.15 3894.82,5783.15 3895.36,5783.69 3900.28,5783.69 3925.34,5758.63 3925.34,5739.16 4084.16,5739.16 v1(4162.01,5817.01)
M_D3: CARD1.2 R17.1 U1.B5 | length 1083.1
  Top Layer w10: v1(3762.01,5927.01) 3762.01,6336.34 CARD1.2@3764.68,6339.02 ; R17.1@3851.67,5642.01 3878.53,5668.87 3878.53,5793.53 v1(3887.01,5802.01) ; v1(4132.01,5817.01) U1.B5@4146.77,5831.73
  Bottom Layer w10: v1(3762.01,5927.01) v1(3887.01,5802.01) 3901.67,5802.01 3950.58,5753.1 4078.39,5753.1 4132.01,5806.72 v1(4132.01,5817.01)
MCLK: P1.13 U1.N6 | length 820.7
  Top Layer w10: P1.13@3546.45,5047.02 v1(3587.01,5047.02) ; v1@4162.01,5472.01 4165,5472.01 U1.N6@4178.27,5485.28
  Bottom Layer w3.94: v1(3587.01,5047.02) 3729.03,5047.02 4113.48,5431.48 4113.48,5443.48 4126.17,5456.17 4144.73,5456.17 4160.01,5471.45 v1(4162.56,5471.45)
PCLK: P1.17 U1.L1 | length 890.4
  Top Layer w3.94: v1(3602.01,5125.75) 3645.14,5168.88 3649.07,5168.88 3659.7,5158.25 3663.64,5158.25 3702.13,5196.74 3702.13,5200.68 3691.5,5211.31 3691.5,5215.24 3729.99,5253.73 3733.93,5253.73 3744.55,5243.11 3748.49,5243.11 3786.98,5281.59 3786.98,5285.53 3776.35,5296.16 3776.35,5300.1 3786.24,5309.98 3790.18,5309.98 3795.61,5304.55 3799.55,5304.55 3838.04,5343.04 3838.04,5346.97 3832.6,5352.41 3832.6,5356.35 3842.56,5366.3 3846.49,5366.3 3849.63,5363.17 3853.57,5363.17 3892.05,5401.66 3892.05,5405.59 3888.92,5408.73 3888.92,5412.67 3937.01,5460.75 3937.01,5489.04 3934.22,5491.82 3914.99,5491.82 3912.21,5494.61 3912.21,5504.79 3914.99,5507.57 3934.22,5507.57 3937.01,5510.35 3937.01,5520.53 3934.22,5523.32 3914.99,5523.32 3912.21,5526.1 3912.21,5536.28 3914.99,5539.07 3934.22,5539.07 3943.9,5548.74 v1(3947.01,5548.74)
  Top Layer w10: P1.17@3546.43,5125.75 v1(3602.01,5125.75) ; v1(3993.77,5553.77) 3999.27,5548.27 U1.L1@4020.79,5548.27
  Bottom Layer w3.94: v1(3947.01,5548.74) 3988.74,5548.74 v1(3993.77,5553.77)
PROGRAM: R37.1 U2.27 U10.3 | length 743.5
  Top Layer w3.94: U2.27@4286.81,4526.5 4446.5,4526.5 v1(4447.01,4527.01) ; v1(4862.01,4587.01) 4864.05,4584.97 R37.1@4912.01,4584.97 4995.11,4584.97 U10.3@5001.66,4578.42
  Bottom Layer w3.94: v1(4447.01,4527.01) 4507.01,4587.01 v1(4862.01,4587.01)
PROGRAMN: pad.55@4287.01,4961.17 R4.2 U1.R9 U2.17 | length 1688.8
  Top Layer w10: v1(4255.56,5438.46) 4256.59,5438.46 U1.R9@4272.76,5422.29 ; v1(4297.01,4717.01) 4476.17,4537.85 4476.17,4091.83 4442.01,4057.67 R4.2@4442.01,4004.05 4439.05,4007.01 U2.17@4342.2,4007.01
  Bottom Layer w10: v1(4255.56,5438.46) 4315.87,5378.15 4315.87,5291.16 4287.01,5262.3 pad.55@4287.01,4961.17 4297.01,4951.17 v1(4297.01,4717.01)
RESET: P1.6 pad.55@3927.13,4766.69 R36.1 U2.31 U10.1 | length 1763
  Top Layer w3.94: v1(4091.81,4602.01) 4152.01,4602.01 4297.01,4747.01 4402.01,4747.01 v1(4452.01,4697.01) ; v1(4812.01,4747.01) 4993.07,4747.01 U10.1@5001.66,4755.59
  Top Layer w10: P1.6@3546.45,4909.23 3679.78,4909.23 v1(3682.01,4907.01) ; U2.31@4091.81,4526.5 v1(4091.81,4602.01)
  Bottom Layer w3.94: v1(4452.01,4697.01) 4762.01,4697.01 v1(4812.01,4747.01)
  Bottom Layer w10: v1(3682.01,4907.01) 3786.81,4907.01 pad.55@3927.13,4766.69 v1(4091.81,4602.01)
RX: U1.K1 U2.36 | length 1792.2
  Top Layer w3.94: v1(3817.01,4452.01) 3817.01,4506.69 U2.36@3836.81,4526.5 ; v1(3892.06,5599.18) 3904.96,5586.27 3995.46,5586.27 4001.97,5579.77 U1.K1@4020.79,5579.77
  Bottom Layer w3.94: v1(3817.01,4452.01) 3622.01,4452.01 3537.01,4537.01 3537.01,5018.42 3554.32,5035.74 3554.32,5329.32 3602.01,5377.01 3669.89,5377.01 3809.06,5516.18 3823.56,5516.18 3832.83,5525.45 3832.83,5539.95 v1(3892.06,5599.18)
SCL: P1.5 R21.1 U2.10 | length 1847.1
  Top Layer w10: P1.5@3546.45,4889.54 v1(3607.01,4889.54) ; v1(4057.01,3757.01) 4089.97,3757.01 R21.1@4092.01,3759.05 ; U2.10@4091.81,3837.52 4092.01,3837.32 R21.1@4092.01,3762.01
  Bottom Layer w10: v1(3607.01,4889.54) 3612.01,4889.54 3612.83,4888.72 3634.82,4888.72 3645.87,4877.67 3645.87,4855.68 4297.01,4204.54 4297.01,4122.3 4302.01,4117.3 4302.01,3787.01 4258.15,3743.15 4174.2,3743.15 4160.34,3757.01 v1(4057.01,3757.01)
SD_A0: U1.T6 U5.23 | length 1783
  Top Layer w3.94: U1.T6@4178.27,5390.79 4427.05,5142.01 4438.86,5142.01 4441.64,5139.22 4441.64,5134.79 4444.43,5132.01 4454.61,5132.01 4457.39,5134.79 4457.39,5139.22 4460.17,5142.01 4470.35,5142.01 4473.14,5139.22 4473.14,5134.79 4475.92,5132.01 4486.1,5132.01 4488.89,5134.79 4488.89,5139.22 4491.67,5142.01 4501.85,5142.01 4504.63,5139.22 4504.63,5134.79 4507.42,5132.01 4517.6,5132.01 4520.38,5134.79 4520.38,5139.22 4523.17,5142.01 4533.35,5142.01 4536.13,5139.22 4536.13,5134.79 4538.91,5132.01 4549.1,5132.01 4551.88,5134.79 4551.88,5139.22 4554.66,5142.01 4564.84,5142.01 4567.63,5139.22 4567.63,5134.79 4570.41,5132.01 4580.59,5132.01 4583.38,5134.79 4583.38,5139.22 4586.16,5142.01 4596.34,5142.01 4599.12,5139.22 4599.12,5134.79 4601.91,5132.01 4612.09,5132.01 4614.87,5134.79 4614.87,5139.22 4617.65,5142.01 4627.84,5142.01 4630.62,5139.22 4630.62,5134.79 4633.4,5132.01 4643.58,5132.01 4646.37,5134.79 4646.37,5139.22 4649.15,5142.01 4659.33,5142.01 4662.12,5139.22 4662.12,5134.79 4664.9,5132.01 4675.08,5132.01 4677.86,5134.79 4677.86,5139.22 4680.65,5142.01 4690.83,5142.01 4693.61,5139.22 4693.61,5134.79 4696.4,5132.01 4706.58,5132.01 4709.36,5134.79 4709.36,5139.22 4712.14,5142.01 4722.32,5142.01 4725.11,5139.22 4725.11,5134.79 4727.89,5132.01 4738.07,5132.01 4740.86,5134.79 4740.86,5139.22 4743.64,5142.01 4753.82,5142.01 4756.6,5139.22 4756.6,5134.79 4759.39,5132.01 4769.57,5132.01 4772.35,5134.79 4772.35,5139.22 4775.14,5142.01 4785.32,5142.01 4788.1,5139.22 4788.1,5134.79 4790.88,5132.01 4801.06,5132.01 4803.85,5134.79 4803.85,5139.22 4806.63,5142.01 4816.81,5142.01 4819.6,5139.22 4819.6,5134.79 4822.38,5132.01 4832.56,5132.01 4835.34,5134.79 4835.34,5139.22 4838.13,5142.01 4848.31,5142.01 4851.09,5139.22 4851.09,5134.79 4853.88,5132.01 4864.06,5132.01 4866.84,5134.79 4866.84,5139.22 4869.62,5142.01 4879.8,5142.01 4882.59,5139.22 4882.59,5134.79 4885.37,5132.01 4895.55,5132.01 4898.34,5134.79 4898.34,5139.22 4901.12,5142.01 4911.3,5142.01 4914.08,5139.22 4914.08,5134.79 4916.87,5132.01 4927.05,5132.01 4929.83,5134.79 4929.83,5139.22 4932.62,5142.01 4942.8,5142.01 4945.58,5139.22 4945.58,5134.79 4948.36,5132.01 4958.54,5132.01 4961.33,5134.79 4961.33,5139.22 4964.11,5142.01 4974.29,5142.01 4977.08,5139.22 4977.08,5134.79 4979.86,5132.01 4990.04,5132.01 4992.82,5134.79 4992.82,5139.22 4995.61,5142.01 5357.01,5142.01 5455.48,5240.48 U5.23@5455.48,5359.88